# Altium PCB FLIGHTUmbilicalBoard_Rev1.PcbDoc
Units mil, origin at the board's own origin, x right, y up, seen from the top; angles counter-clockwise.
Board outline 3570 x 3720 mil, 6 copper layers (Top Layer, Mid-Layer 1, Mid-Layer 2, Internal Plane 1, Internal Plane 2, Bottom Layer); 33 components, 52 nets, 325 pads, 4 vias.
Unrouted connection lines stored in the file: 8.
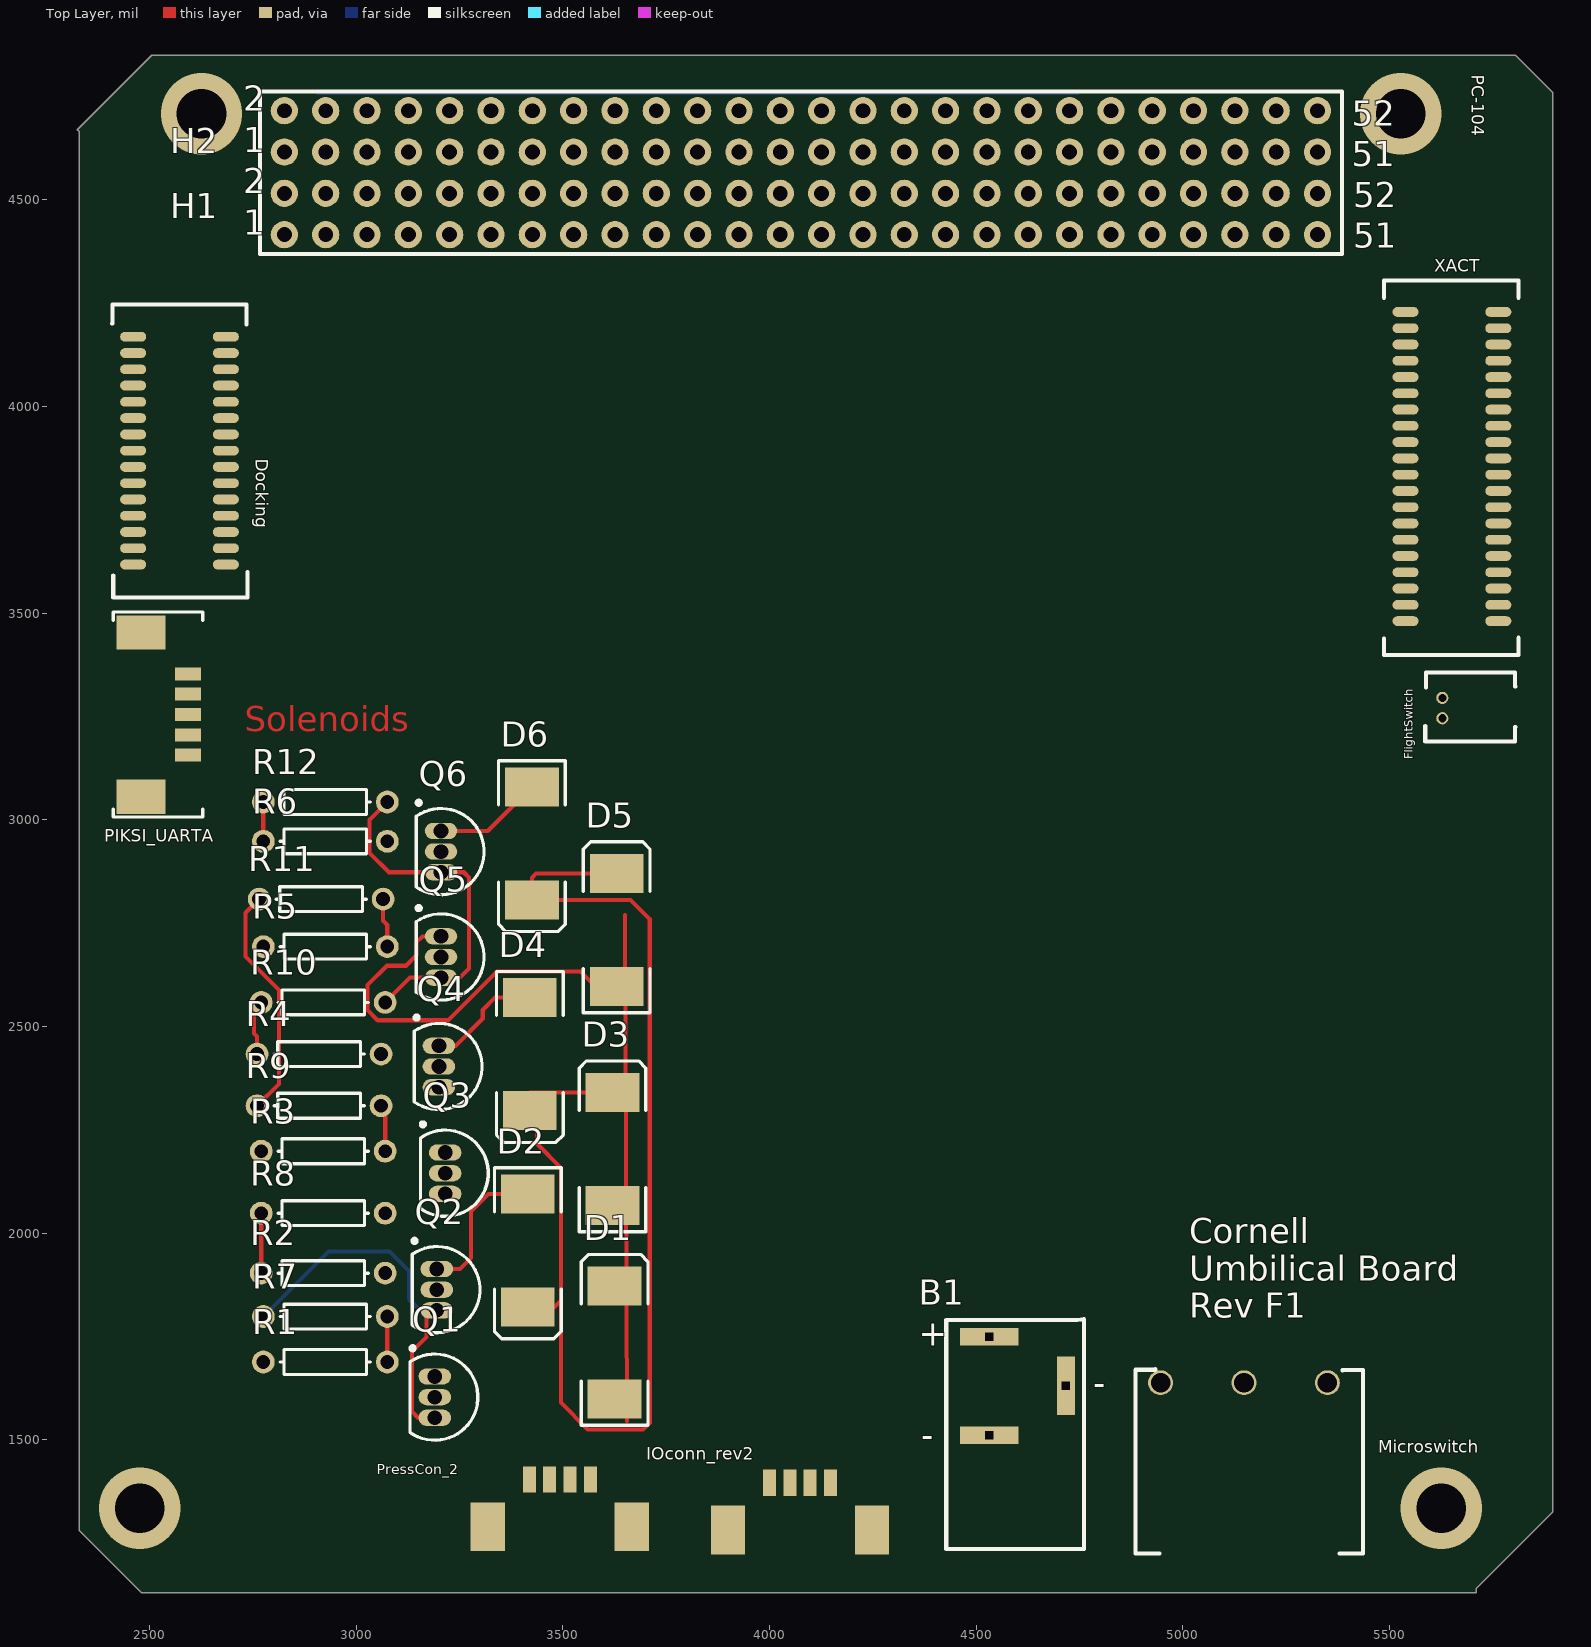
[diagram p0: Top Layer view]
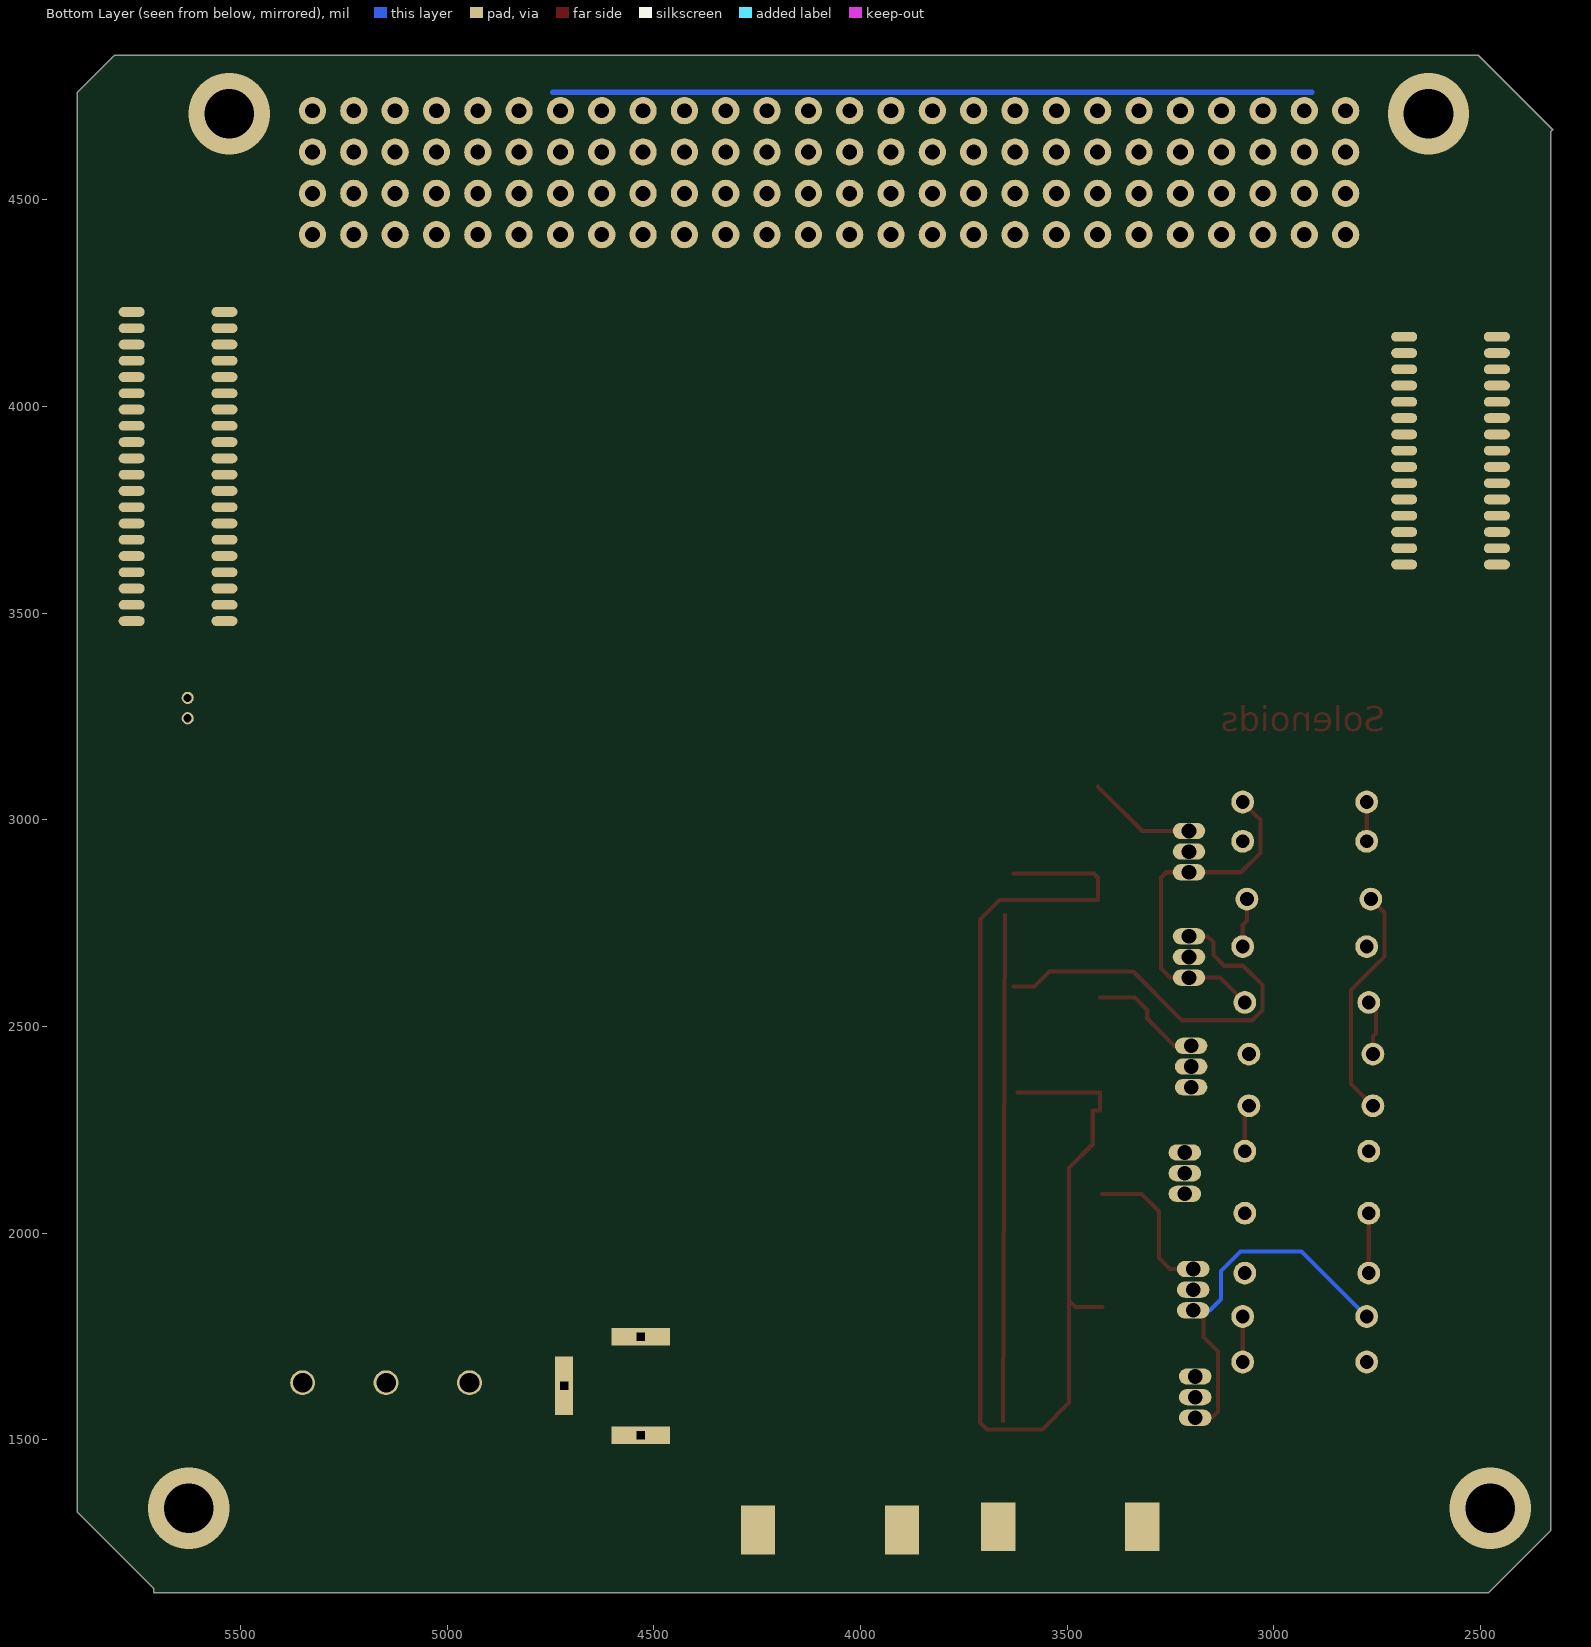
[diagram p1: Bottom Layer view, seen from below]
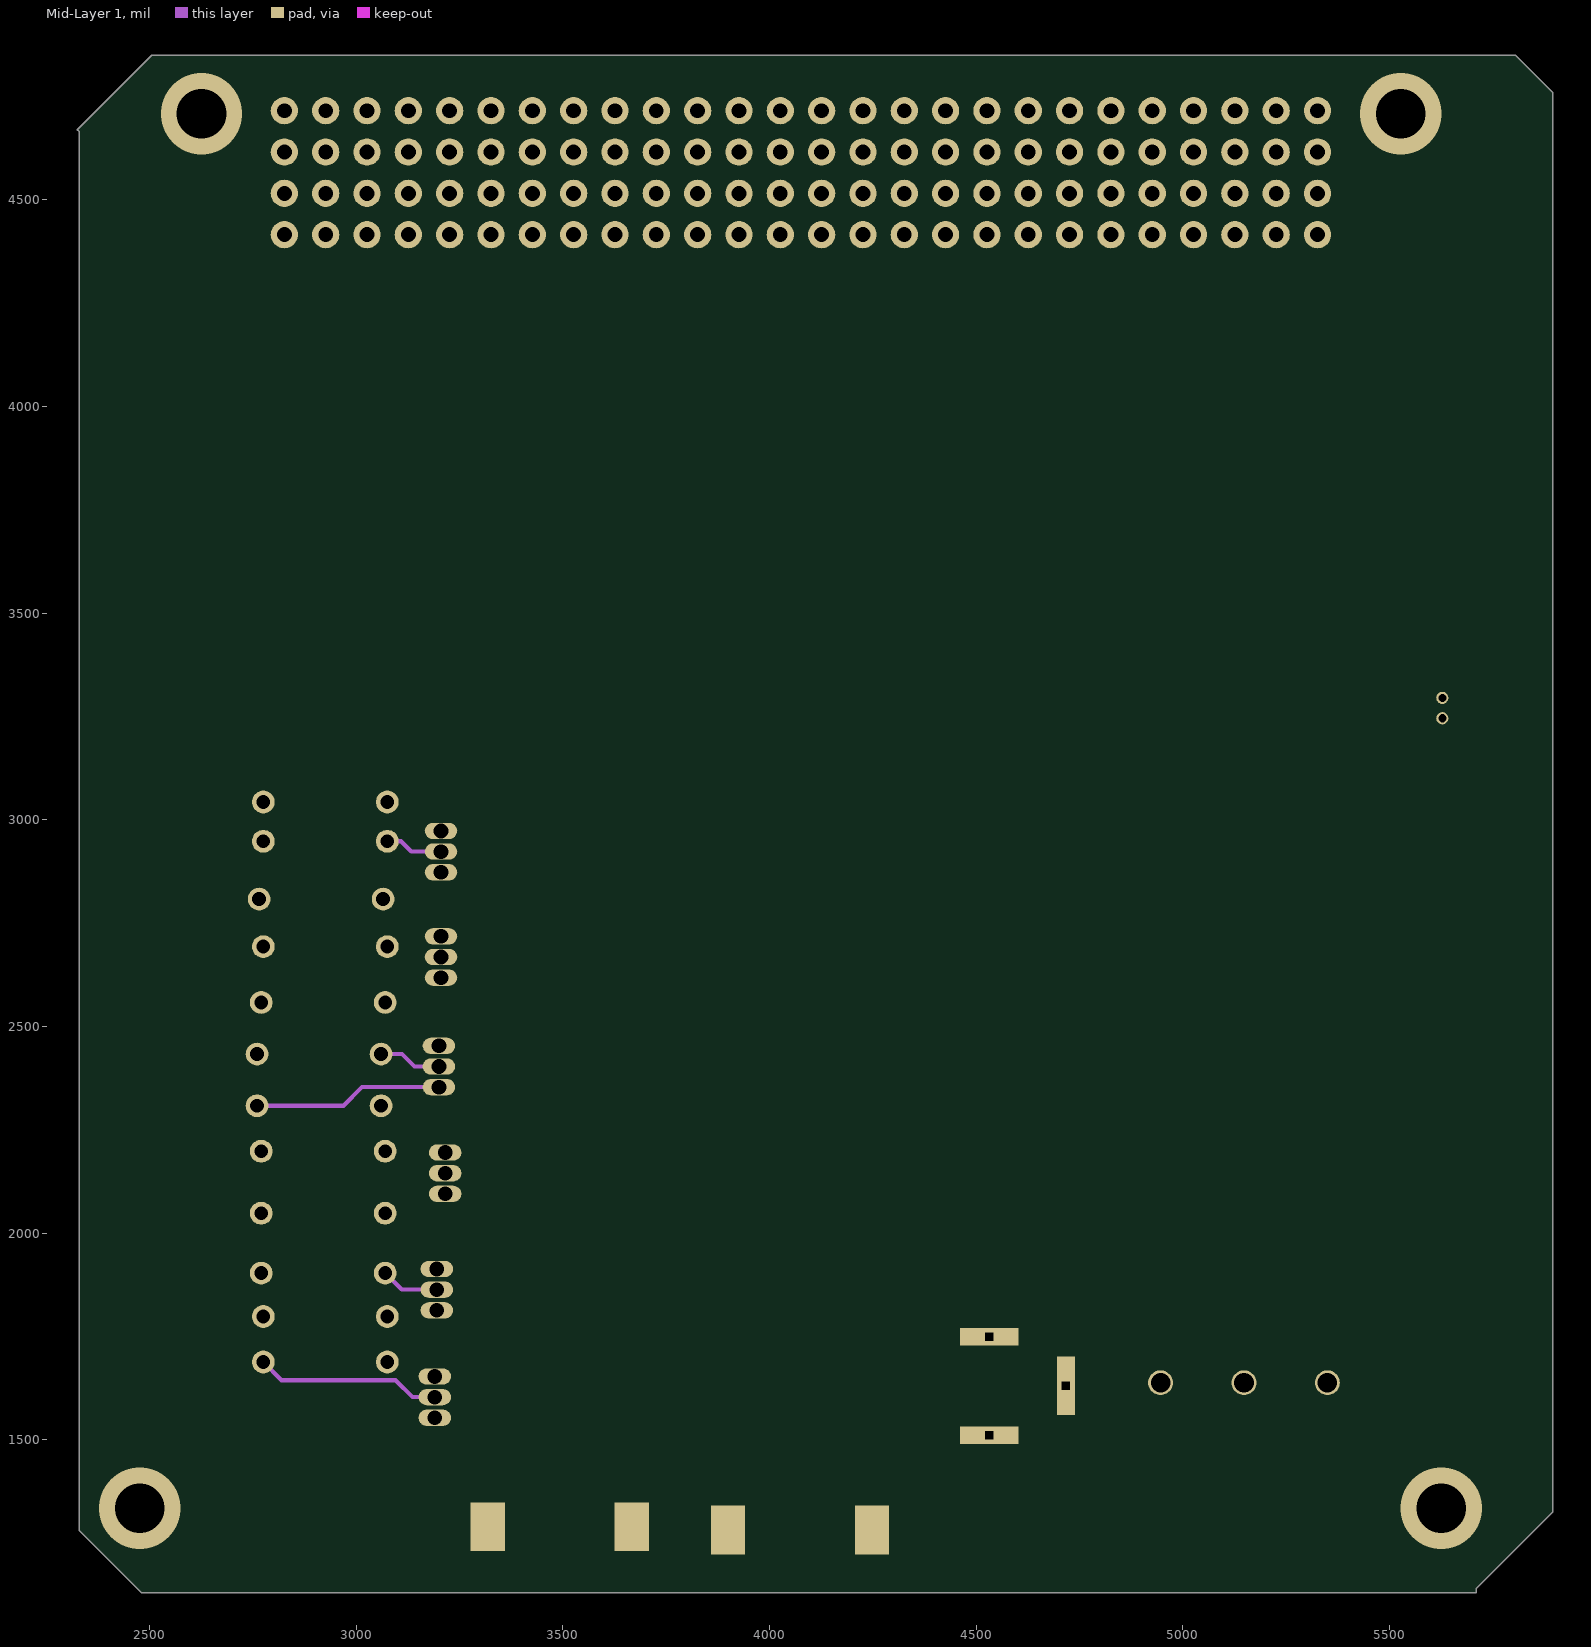
[diagram p2: Mid-Layer 1]
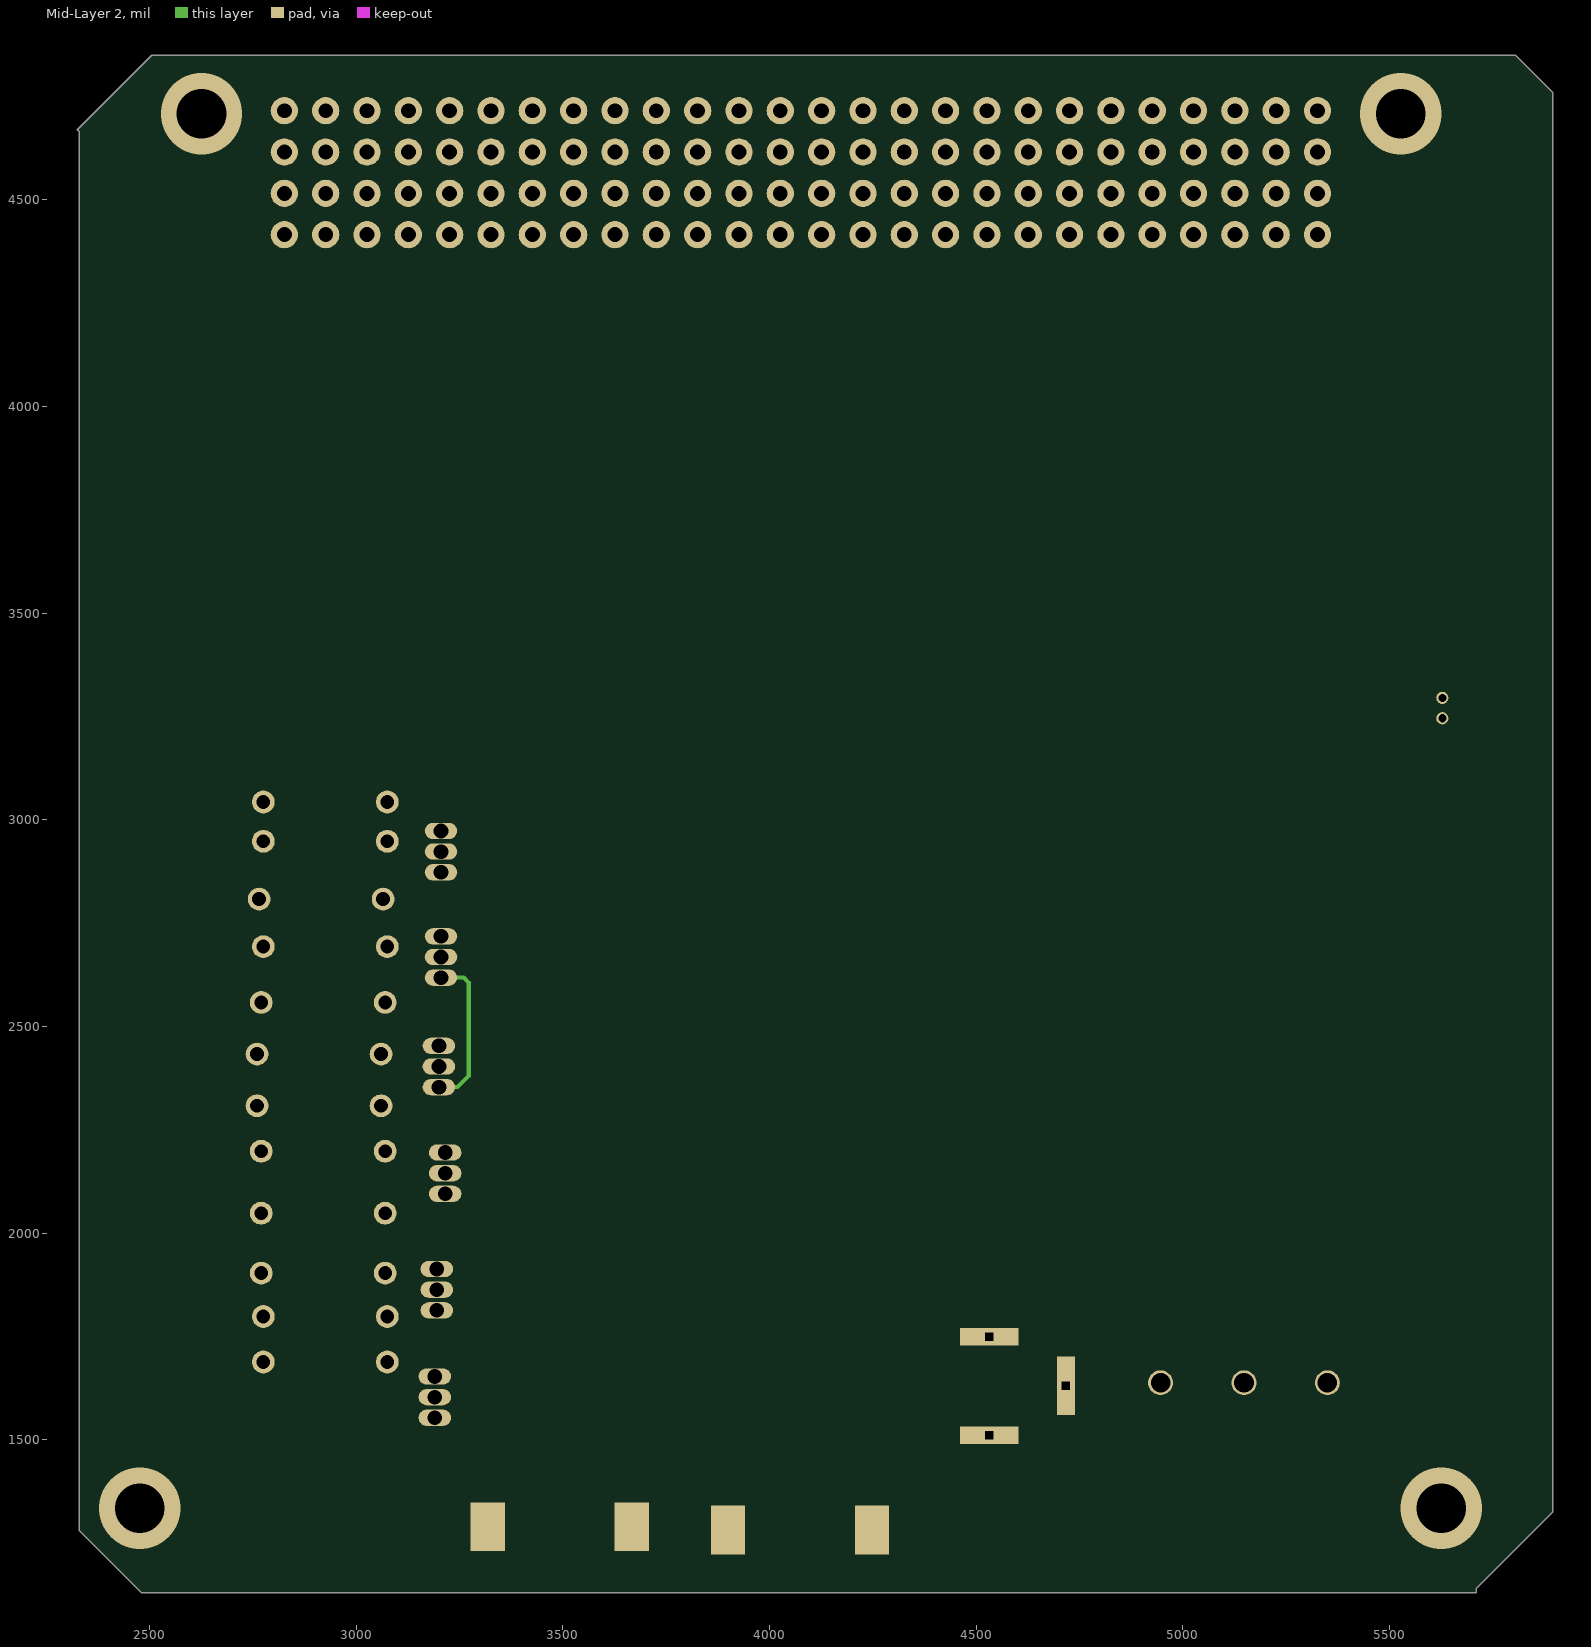
[diagram p3: Mid-Layer 2]
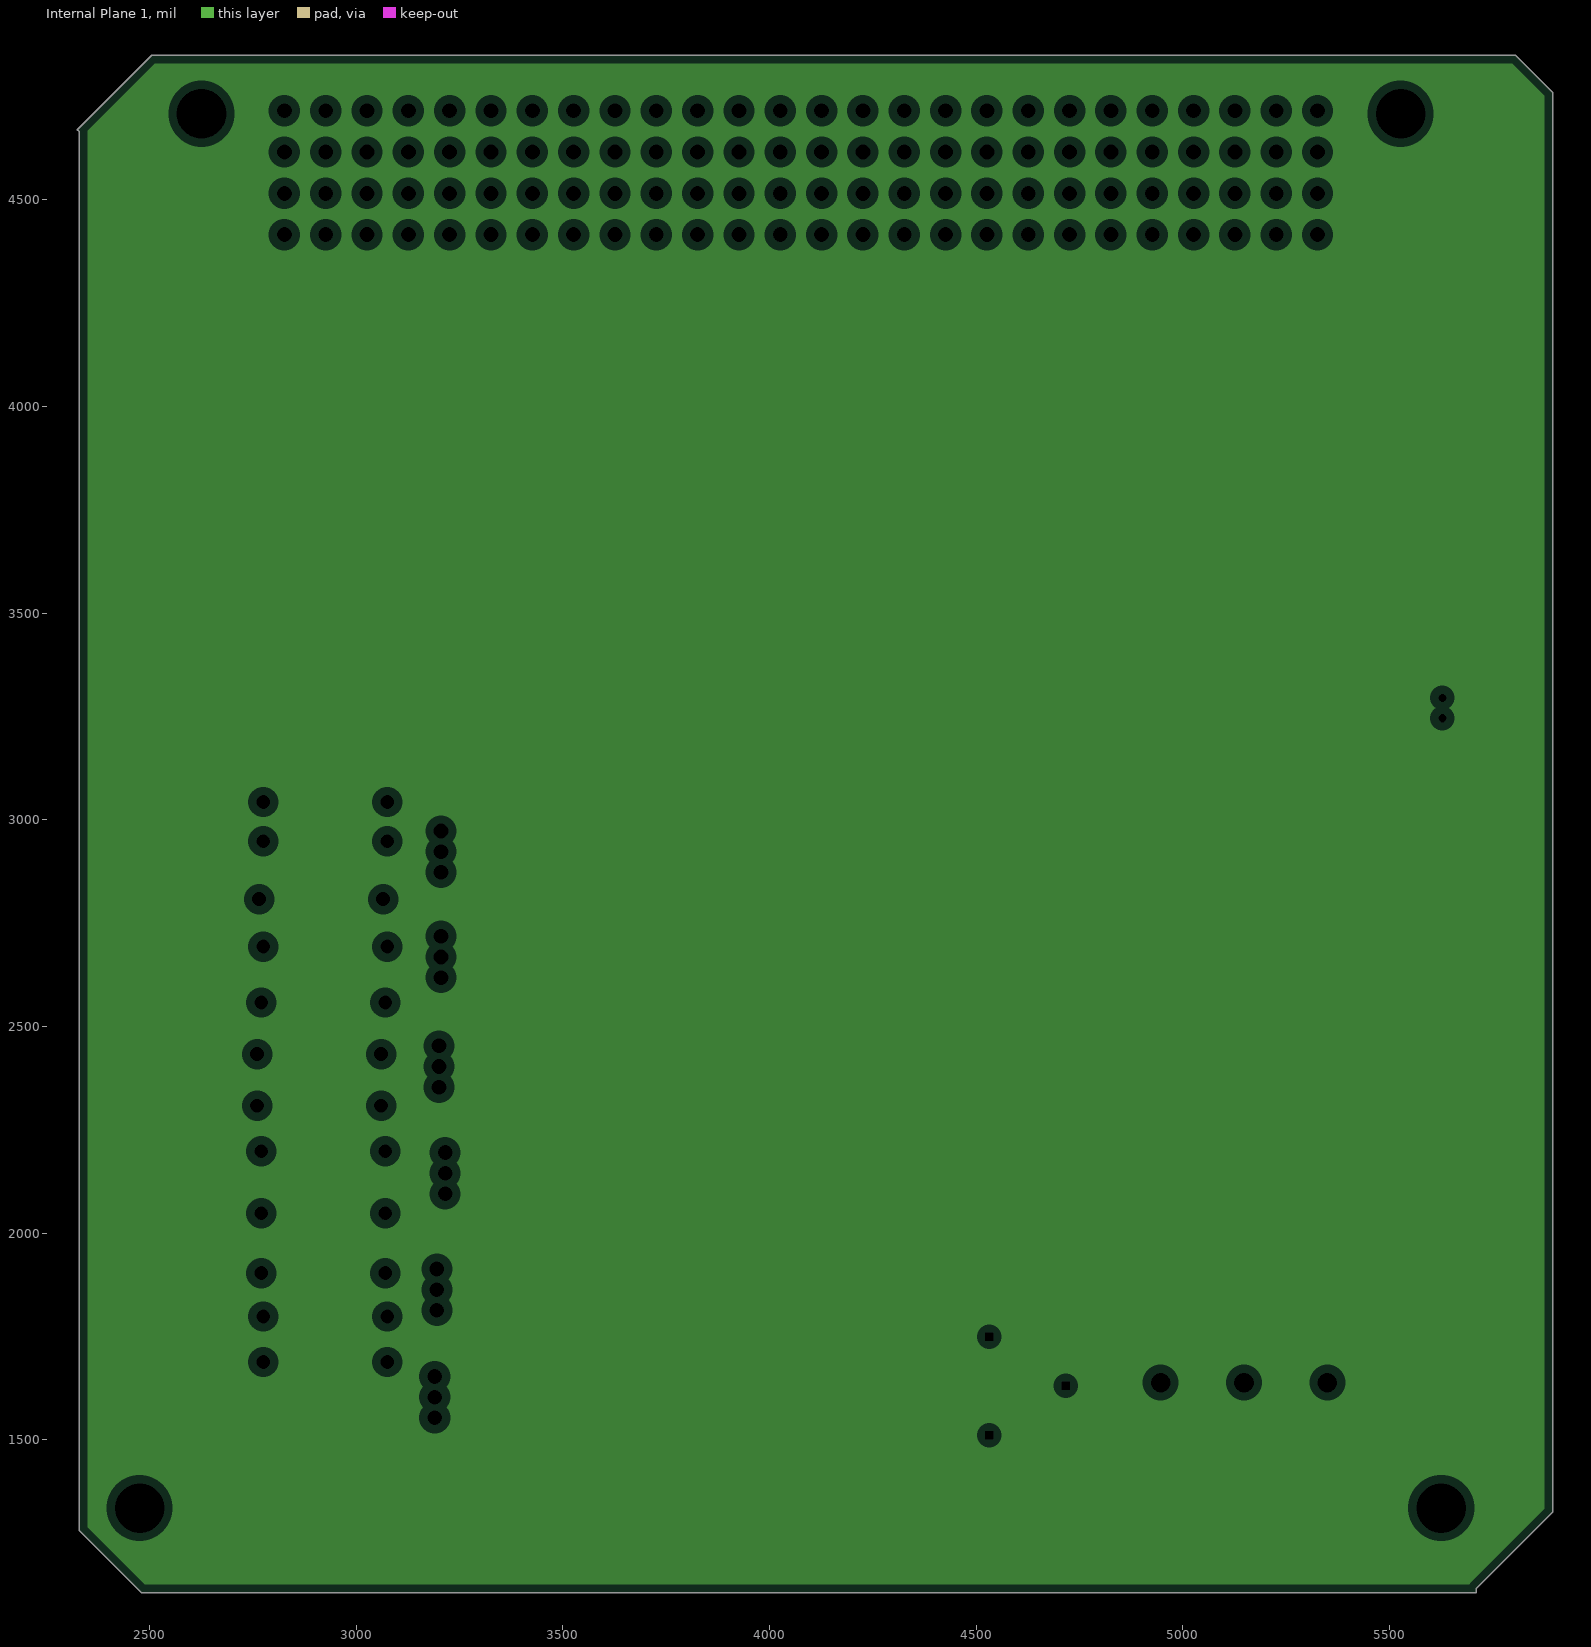
[diagram p4: Internal Plane 1, clearances drawn from the general rule]
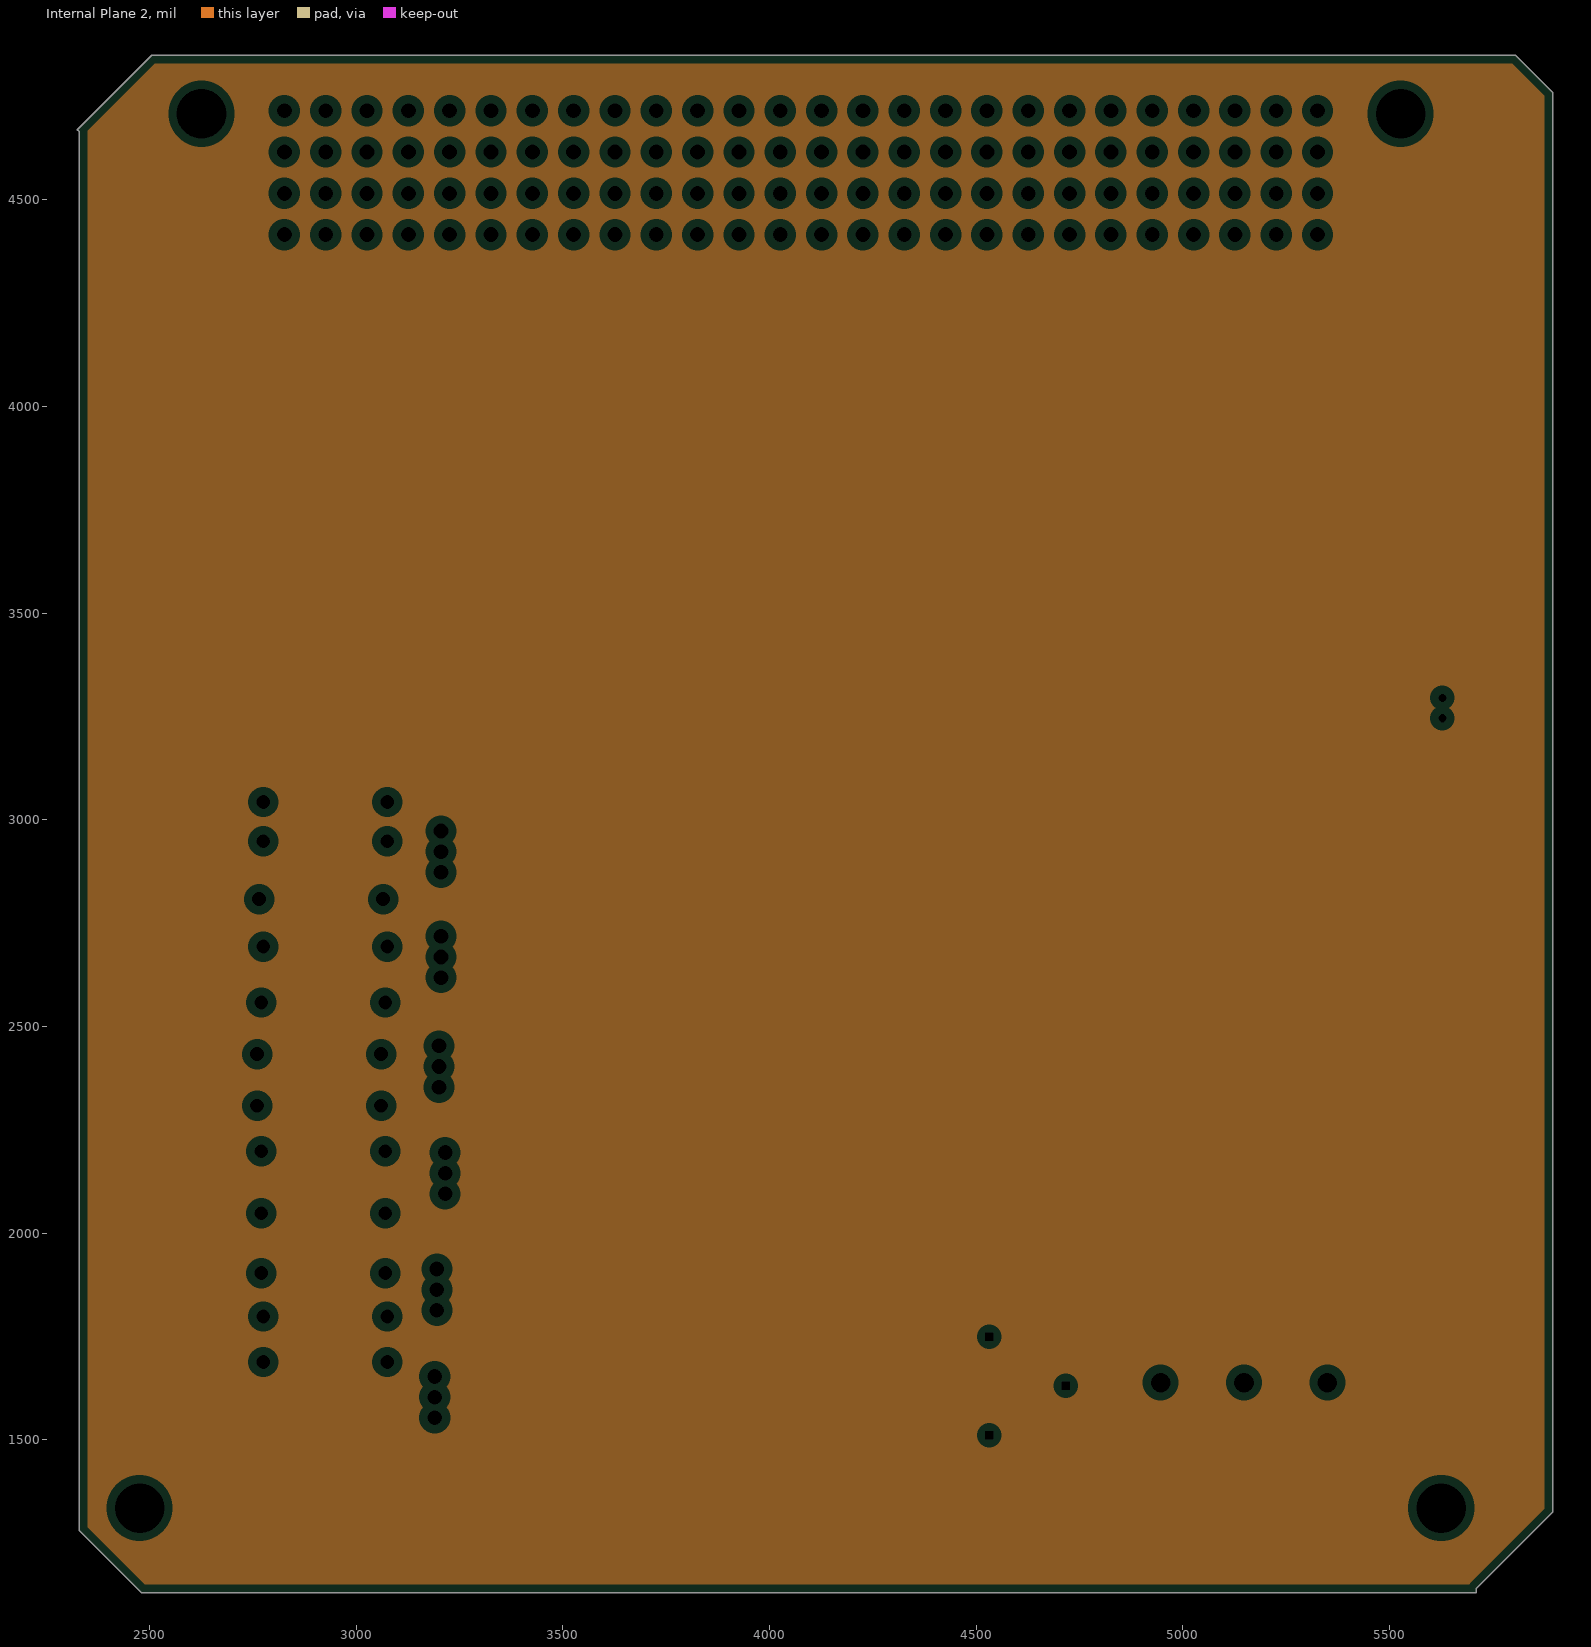
[diagram p5: Internal Plane 2, clearances drawn from the general rule]

## Layer stack, top to bottom
Top Solder: solder mask 0.4, Solder Resist, Dk 3.5
Top Layer: signal copper 1.4
Dielectric 1: dielectric 12.6, FR-4, Dk 4.8
Mid-Layer 1: signal copper 1.4
Dielectric4: dielectric 12.6, FR-4, Dk 4.8
Mid-Layer 2: signal copper 1.4
Dielectric5: dielectric 12.6, FR-4, Dk 4.8
Internal Plane 1: plane copper 1.4
Dielectric2: dielectric 12.6, FR-4, Dk 4.8
Internal Plane 2: plane copper 1.4
Dielectric3: dielectric 12.6, FR-4, Dk 4.8
Bottom Layer: signal copper 1.4
Bottom Solder: solder mask 0.4, Solder Resist, Dk 3.5

## Board outline
2510,4850 2505,4850 2325,4670 2330,4665 2330,1280 2480,1130 5710,1130 5710,1140 5885,1315 5895,1325 5895,4755 5895,4760 5805,4850 2510,4850

## Design rules (kind name [scope] priority, off if disabled: settings)
Clearance [All] p1: gap=10
PlaneClearance [All] p1: clearance=20
PlaneConnect [All] p1: planeconnectstyle=Relief reliefexpansion=20 reliefentries=4 reliefconductorwidth=10 reliefairgap=10
PolygonConnect [All] p1: connectstyle=Relief reliefconductorwidth=10 reliefentries=4 polygonreliefangle="90 Angle" airgapwidth=10
RoomDefinition Propulsion [InComponentClass('Propulsion')] p1: confinementstyle=ConfineIn formatcopy=TRUE lockcomponents=FALSE outline 2705,1486.38 3745,1486.38 3745,3266.38 2705,3266.38
RoutingVias [All] p1: holewidth=28 width=50 viastyle="Through Hole" minholewidth=28 minwidth=50 maxholewidth=28 maxwidth=50
SolderMaskExpansion [All] p1: expansion=4
Width [All] p1: maxlimit=10 minlimit=10 preferedwidth=10
28 further rules are at their usual default settings.

## Classes and differential pairs
component class 2017-04-23_07-42-101: Ccomp Ccomp2 Cout Cout_2 Css Iout L1 M1 Rcomp Rt U1 Vin
component class 2017-04-23_07-49-121: Ccomp Ccomp2 Cout Cout_2 Css Iout L1 M1 Rcomp Rt U1 Vin
component class BarrelJack: B1
component class CDGPS: PIKSI_UARTA
component class Propulsion: D2 D3 D4 D5 D6 Q1 Q2 Q4 Q5 Q6 R1 R2 R3 R4 R5 R6 R7 R8 R9 R10 R11 R12 SolConn

## Components (designator, comment, footprint, x,y, rotation, side; value= is the part's Value field where it differs from the comment)
B1 "Barrel_Jack" Barrel_Jack 4532,1511 r0 top
D1 "Diode" SMC 3625,1735 r90 top
D2 "Diode" SMC 3415,1958.19 r270 top
D3 "Diode" SMC 3620,2203.19 r90 top
D4 "Diode" SMC 3420,2433.19 r270 top
D5 "Diode" SMC 3630,2733.19 r90 top
D6 "Diode" SMC 3425,2943.19 r270 top
Docking "Docking_Molex_30Pin" DOCKING_MOLEX_30PIN 2460,4169 r270 top
FlightSwitch "RemoverBeforeFlightSwitch" "REMOVERBEFOREFLIGHT SWITCH" 5628,3169 r90 top
IOconn_rev2 "IOconn_rev2" IOCONN_REV2 4000,1396 r0 top
Microswitch "MicroSwitch" MICROSWITCH_3PIN 5150,1640 r180 top locked
PC-104 "PC-104" ? 2826,4416 r0 top locked
PIKSI_UARTA "PIKSI_UART Connector" "MOLEX PICOBLADE 5 PIN" 2420,3495 r270 top
PressCon_2 "PressureConn_2" PRESSCON_2 3392,1378 r0 top
Q1 "MOSFET" TO-226-AA 3190,1603.19 r180 top
Q2 "MOSFET" TO-226-AA 3195,1863.19 r180 top
Q3 "MOSFET" TO-226-AA 3215,2145 r180 top
Q4 "MOSFET" TO-226-AA 3200,2403.19 r180 top
Q5 "MOSFET" TO-226-AA 3205,2668.19 r180 top
Q6 "MOSFET" TO-226-AA 3205,2923.19 r180 top
R1 "100" AXIAL-0.3 2925,1688.19 r180 top
R2 "100" AXIAL-0.3 2920,1903.19 r0 top
R3 "100" AXIAL-0.3 2920,2198.19 r180 top
R4 "100" AXIAL-0.3 2910,2433.19 r0 top
R5 "100" AXIAL-0.3 2925,2693.19 r180 top
R6 "100" AXIAL-0.3 2925,2948.19 r0 top
R7 "10k" AXIAL-0.3 2925,1798.19 r0 top
R8 "10k" AXIAL-0.3 2920,2048.19 r180 top
R9 "10k" AXIAL-0.3 2910,2308.19 r0 top
R10 "10k" AXIAL-0.3 2920,2558.19 r180 top
R11 "10k" AXIAL-0.3 2915,2808.19 r0 top
R12 "10k" AXIAL-0.3 2925,3043.19 r180 top
XACT "XACT_Molex_40Pin" XACT_MOLEX_40PIN 5539,4229 r270 top

## Footprints (in the part's own frame and the unit in brackets; to place one, negate y for a bottom-side part, rotate by r counter-clockwise, add the part's x,y. Pads: shape width x height; smd on the part's side, far side on the other; paste and mask are expansions set on the pad)
AXIAL-0.3 [mm] "Axial Device, Thru-Hole; 2 Leads; 0.3 in Pin Spacing"
  round 1.4 hole 0.85: 1(-3.81,0) 2(3.81,0)
  silkscreen extent -2.77,-0.76 2.77,0.76
Barrel_Jack [mm] "KLDX-0202-B"
  rect 3.6x1.1 hole 0.5 square: 0(0,0) 2(0,6.05)
  rect 1.1x3.6 hole 0.5 square: 1(4.7,3.05)
  silkscreen extent -2.65,-7 5.82,7.13
DOCKING_MOLEX_30PIN [mm] "501571-3007"
  oval 0.6x1.6 smd: A1(0,0) A2(1,0) A3(2,0) A4(3,0) A5(4,0) A6(5,0) A7(6,0) A8(7,0) A9(8,0) A10(9,0) A11(10,0) A12(11,0) A13(12,0) A14(13,0) A15(14,0) A16(0,5.7) A17(1,5.7) A18(2,5.7) A19(3,5.7) A20(4,5.7) A21(5,5.7) A22(6,5.7) A23(7,5.7) A24(8,5.7) A25(9,5.7) A26(10,5.7) A27(11,5.7) A28(12,5.7) A29(13,5.7) A30(14,5.7)
  oval 0.6x1.6 smd far side: B1(0,0) B2(1,0) B3(2,0) B4(3,0) B5(4,0) B6(5,0) B7(6,0) B8(7,0) B9(8,0) B10(9,0) B11(10,0) B12(11,0) B13(12,0) B14(13,0) B15(14,0) B16(0,5.7) B17(1,5.7) B18(2,5.7) B19(3,5.7) B20(4,5.7) B21(5,5.7) B22(6,5.7) B23(7,5.7) B24(8,5.7) B25(9,5.7) B26(10,5.7) B27(11,5.7) B28(12,5.7) B29(13,5.7) B30(14,5.7)
  silkscreen extent -1.98,-1.3 16.03,7.02, body extent -1.97,-1.27 16.02,6.98, height 2.95
IOCONN_REV2 [mm] "Molex 4 Pin Picoblade. Part # 53261-0471"
  rect 0.8x1.6 smd: 1(0,0) 2(1.25,0) 3(2.5,0) 4(3.75,0)
  rect 2.1x3 all layers, no hole: 5(-2.55,-2.9) 6(6.3,-2.9)
  body extent -3.22,-4.47 6.93,0.73, height 1.7
MICROSWITCH_3PIN [mm] "Omron Electronics Inc-EMC Div D2FS-FL-N-A1"
  round 1.524 hole 1.2: 1(-5.08,0.05) 2(0.05,0.05) 3(5.18,0.05)
  silkscreen extent -7.25,-0.78 6.73,10.55, body extent -7.25,-0.75 6.73,10.55
"MOLEX PICOBLADE 5 PIN" [mm] "Molex Picoblade Header, SMT, Right Angle  53261-0571"
  rect 0.8x1.6 smd: 0(3.6,4.4) 1(4.85,4.4) 2(6.1,4.4) 3(7.35,4.4) 4(8.6,4.4)
  rect 2.1x3 smd: 5(1.05,1.5) 6(11.15,1.5)
  silkscreen extent -0.2,-0.2 12.4,5.3, body extent 0.4,0 11.8,5.2, height 3.4
PRESSCON_2 [mm] "Molex Picoblade 4 pin (for the second pressure conn) Part # 53261-0471"
  rect 0.8x1.6 smd: 1(0.675,0.65) 2(1.925,0.65) 3(3.175,0.65) 4(4.425,0.65)
  rect 2.1x3 all layers, no hole: 5(-1.875,-2.25) 6(6.975,-2.25)
  body extent -2.55,-3.82 7.6,1.38, height 1.7
"REMOVERBEFOREFLIGHT SWITCH" [mm] "Molex Picoblade Part Number: 53048-0210"
  round 0.75 hole 0.5: 1(1.95,0) 2(3.205,0)
  silkscreen extent 0.53,-4.5 4.78,1.05, body extent 0.53,-4.47 4.78,1.03, height 4.05
SMC [mm] "DO-214-AB/SMC; 2 C-Bend Leads; Body 7.9 x 5.9 mm, inc. leads (LxW)"
  rect 2.4x3.3 smd: 1(-3.475,0) 2(3.475,0)
  silkscreen extent -5.08,-2.05 5.42,2.06
TO-226-AA [mm] "TO, Flat Index; 3 In-Line, Axial Leads; Body Dia. 4.8mm; Leads 0.55 x 0.51 mm (max)"
  oval 2x1 hole 0.9: 1(0,-1.27) 2(0,0) 3(0,1.27)
  silkscreen extent -2.65,-3.13 1.52,2.65, body extent -2.65,-2.66 1.52,2.66, height 5.33
XACT_MOLEX_40PIN [mm] "501571-4007"
  oval 0.6x1.6 smd: A1(0,0) A2(1,0) A3(2,0) A4(3,0) A5(4,0) A6(5,0) A7(6,0) A8(7,0) A9(8,0) A10(9,0) A11(10,0) A12(11,0) A13(12,0) A14(13,0) A15(14,0) A16(15,0) A17(16,0) A18(17,0) A19(18,0) A20(19,0) A21(0,5.7) A22(1,5.7) A23(2,5.7) A24(3,5.7) A25(4,5.7) A26(5,5.7) A27(6,5.7) A28(7,5.7) A29(8,5.7) A30(9,5.7) A31(10,5.7) A32(11,5.7) A33(12,5.7) A34(13,5.7) A35(14,5.7) A36(15,5.7) A37(16,5.7) A38(17,5.7) A39(18,5.7) A40(19,5.7)
  oval 0.6x1.6 smd far side: B1(0,0) B2(1,0) B3(2,0) B4(3,0) B5(4,0) B6(5,0) B7(6,0) B8(7,0) B9(8,0) B10(9,0) B11(10,0) B12(11,0) B13(12,0) B14(13,0) B15(14,0) B16(15,0) B17(16,0) B18(17,0) B19(18,0) B20(19,0) B21(0,5.7) B22(1,5.7) B23(2,5.7) B24(3,5.7) B25(4,5.7) B26(5,5.7) B27(6,5.7) B28(7,5.7) B29(8,5.7) B30(9,5.7) B31(10,5.7) B32(11,5.7) B33(12,5.7) B34(13,5.7) B35(14,5.7) B36(15,5.7) B37(16,5.7) B38(17,5.7) B39(18,5.7) B40(19,5.7)
  silkscreen extent -1.92,-1.32 21.08,6.95, body extent -1.85,-1.35 21.15,6.9, height 2.95
? [mil] "ESQ-126-14-G-D"
  round 65.98 hole 35.98 mask+2.99: H1_1(0,0) H1_2(0,100) H1_3(100,0) H1_4(100,100) H1_5(200,0) H1_6(200,100) H1_7(300,0) H1_8(300,100) H1_9(400,0) H1_10(400,100) H1_11(500,0) H1_12(500,100) H1_13(600,0) H1_14(600,100) H1_15(700,0) H1_16(700,100) H1_17(800,0) H1_18(800,100) H1_19(900,0) H1_20(900,100) H1_21(1000,0) H1_22(1000,100) H1_23(1100,0) H1_24(1100,100) H1_25(1200,0) H1_26(1200,100) H1_27(1300,0) H1_28(1300,100) H1_29(1400,0) H1_30(1400,100) H1_31(1500,0) H1_32(1500,100) H1_33(1600,0) H1_34(1600,100) H1_35(1700,0) H1_36(1700,100) H1_37(1800,0) H1_38(1800,100) H1_39(1900,0) H1_40(1900,100) H1_41(2000,0) H1_42(2000,100) H1_43(2100,0) H1_44(2100,100) H1_45(2200,0) H1_46(2200,100) H1_47(2300,0) H1_48(2300,100) H1_49(2400,0) H1_50(2400,100) H1_51(2500,0) H1_52(2500,100) H2_1(0,200) H2_2(0,300) H2_3(100,200) H2_4(100,300) H2_5(200,200) H2_6(200,300) H2_7(300,200) H2_8(300,300) H2_9(400,200) H2_10(400,300) H2_11(500,200) H2_12(500,300) H2_13(600,200) H2_14(600,300) H2_15(700,200) H2_16(700,300) H2_17(800,200) H2_18(800,300) H2_19(900,200) H2_20(900,300) H2_21(1000,200) H2_22(1000,300) H2_23(1100,200) H2_24(1100,300) H2_25(1200,200) H2_26(1200,300) H2_27(1300,200) H2_28(1300,300) H2_29(1400,200) H2_30(1400,300) H2_31(1500,200) H2_32(1500,300) H2_33(1600,200) H2_34(1600,300) H2_35(1700,200) H2_36(1700,300) H2_37(1800,200) H2_38(1800,300) H2_39(1900,200) H2_40(1900,300) H2_41(2000,200) H2_42(2000,300) H2_43(2100,200) H2_44(2100,300) H2_45(2200,200) H2_46(2200,300) H2_47(2300,200) H2_48(2300,300) H2_49(2400,200) H2_50(2400,300) H2_51(2500,200) H2_52(2500,300)
  silkscreen extent -59,-47 2559,347

## Part data
D1 D2 D3 D4 D5 D6: "Default Diode"
Docking: "24 Pin Connector"
FlightSwitch: "53048-0210 Molex Picoblade"
IOconn_rev2: "Part Number: 53261-0471"
Microswitch: "Omron Electronics Inc-EMC Div D2FS-FL-N-A1"
PC-104: "ESQ-126-14-G-D (2 total needed)"
PIKSI_UARTA: "Molex Picoblade 5 Pin"
Q1 Q2 Q3 Q4 Q5 Q6: library part MOSFET-N, "N-Channel MOSFET"
R1 R2 R3 R4 R5 R6 R7 R8 R9 R10 R11 R12: library part PMR100HZPFU6L00, "Imported"
XACT: "31 Pin Airborn Nano Connector"

## Via types
v1: diameter 196.85, hole 120, Top Layer to Bottom Layer, 4 vias

## Nets (pads, with @x,y where several pads share a name; then routed paths per layer and width w, separated by ;. In a path a pad name is that pad's centre, name@x,y a point inside that pad or via, vN(x,y) a via of type N, cw(c..) or ccw(c..) an arc to the next point about the centre after c; other vN are vias at no path point)
0: 
+5V_3: PIKSI_UARTA.4
+12V_1_JUMP10: D2.2 D3.2 D4.2 D5.2 D6.2 | length 3112.3
  Top Layer w10: D2.2 3480,1821.38 3495,1836.38 ; D3.2 3420,2340 D4.2 3438,2296.38 3438,2215 3495,2158 3495,1836.38 ; D5.2 3435,2870 3425,2860 D6.2 3663.62,2806.38 3710,2760 3710,1541 3694,1525 3560,1525 3495,1590 3495,1836.38
FB1: Q1.1
FB2: D2.1 Q2.1 | length 361.5
  Top Layer w10: Q2.1 3251.19,1913.19 3278,1940 3278,2053 3320,2095 D2.1
FB3: D3.1 Q3.1
FB4: D4.1 Q4.1 | length 280.6
  Top Layer w10: Q4.1 3240,2453.19 3306,2519.19 3306,2540 3336,2570 D4.1
FB5: D5.1 Q5.1 | length 982.6
  Top Layer w10: Q5.1 3160,2718.19 3146,2704.19 3146,2673 3120,2647 3074,2647 3027,2600 3027,2540 3052,2515 3222,2515 3340,2633 3542.38,2633 3579,2596.38 D5.1
FB6: D6.1 Q6.1 | length 264.2
  Top Layer w10: Q6.1 3318.19,2973.19 D6.1
GOM_GND_1: B1.0 B1.1 PIKSI_UARTA.0 Q1.3 Q2.3 Q3.3 Q4.3 Q5.3 Q6.3 R7.1 R8.1 R9.1 R10.1 R11.1 R12.1 | length 3203
  Top Layer w10: R9.1 2813,2361.19 2813,2588 2732,2669 2732,2775.19 R11.1 ; R10.1 3130,2618.19 Q5.3 3251.19,2618.19 3273,2640 3273,2860.19 3260,2873.19 Q6.3 3078.81,2873.19 3032,2920 3032,3000.19 R12.1 ; Q1.3 3150,1553.19 3135,1568.19 3135,1714 3170,1749 3170,1813.19 Q2.3
  Mid-Layer 1 w10: R9.1 2969.19,2308.19 3014.19,2353.19 Q4.3
  Mid-Layer 2 w10: Q4.3 3245.19,2353.19 3272,2380 3272,2606.19 3260,2618.19 Q5.3
  Bottom Layer w10: R7.1 2932.81,1956 3080,1956 3128,1908 3128,1840 3154.81,1813.19 Q2.3
NetB1_2: B1.2
NetC12_1: 
NetC12_2: 
NetCboot_1: 
NetCboot_2: 
NetCbyp_1: 
NetCcomp2_1: 
NetCcomp2_2: 
NetCcomp_1: 
NetCcomp_2: 
NetCcs_1: 
NetCin_1: 
NetCout1_1: D1.2
NetCout_1: 
NetCss_1: 
NetCvcc_1: 
NetD1_1: D1.1
NetL1_2: 
NetM1_1: 
NetM1_4: 
NetM2_1: 
NetM2_4: 
NetM2_5: 
NetQ1_2: Q1.2 R1.2 | length 450.2
  Mid-Layer 1 w10: R1.2 2819.19,1644 3095.19,1644 3136,1603.19 Q1.2
NetQ2_2: Q2.2 R2.2 | length 141.6
  Mid-Layer 1 w10: R2.2 3110,1863.19 Q2.2
NetQ3_2: Q3.2 R3.2
NetQ4_2: Q4.2 R4.2 | length 152.4
  Mid-Layer 1 w10: R4.2 3111,2433.19 3141,2403.19 Q4.2
NetQ6_2: Q6.2 R6.2 | length 140.4
  Mid-Layer 1 w10: R6.2 3108,2948.19 3133,2923.19 Q6.2
NetR1_1: R1.1 R7.2 | length 110
  Top Layer w10: R1.1 R7.2
NetR2_1: R2.1 R8.2 | length 145
  Top Layer w10: R2.1 R8.2
NetR3_1: R3.1 R9.2 | length 120
  Top Layer w10: R9.2 3070,2308.19 R3.1
NetR4_1: R4.1 R10.2 | length 135.4
  Top Layer w10: R4.1 2760,2476 2752.5,2483.5 2752.5,2540.69 R10.2
NetR5_1: R5.1 R11.2 | length 119.1
  Top Layer w10: R11.2 3065,2756 3075,2746 R5.1
NetR6_1: R6.1 R12.2 | length 95
  Top Layer w10: R6.1 R12.2
NetR19_1: 
NetRfbb_1: 
NetRpg_2: 
NetRs2_1: 
NetRt_2: 
NetRuv1_2: 
UART5_RX_J5: PIKSI_UARTA.1
UART5_TX_J6: PIKSI_UARTA.2
pads on no net: Docking.A1 Docking.A2 Docking.A3 Docking.A4 Docking.A5 Docking.A6 Docking.A7 Docking.A8 Docking.A9 Docking.A10 Docking.A11 Docking.A12 Docking.A13 Docking.A14 Docking.A15 Docking.A16 Docking.A17 Docking.A18 Docking.A19 Docking.A20 Docking.A21 Docking.A22 Docking.A23 Docking.A24 Docking.A25 Docking.A26 Docking.A27 Docking.A28 Docking.A29 Docking.A30 Docking.B1 Docking.B2 Docking.B3 Docking.B4 Docking.B5 Docking.B6 Docking.B7 Docking.B8 Docking.B9 Docking.B10 Docking.B11 Docking.B12 Docking.B13 Docking.B14 Docking.B15 Docking.B16 Docking.B17 Docking.B18 Docking.B19 Docking.B20 Docking.B21 Docking.B22 Docking.B23 Docking.B24 Docking.B25 Docking.B26 Docking.B27 Docking.B28 Docking.B29 Docking.B30 FlightSwitch.1 FlightSwitch.2 IOconn_rev2.1 IOconn_rev2.2 IOconn_rev2.3 IOconn_rev2.4 IOconn_rev2.5 IOconn_rev2.6 Microswitch.1 Microswitch.2 Microswitch.3 PC-104.H1_1 PC-104.H1_2 PC-104.H1_3 PC-104.H1_4 PC-104.H1_5 PC-104.H1_6 PC-104.H1_7 PC-104.H1_8 PC-104.H1_9 PC-104.H1_10 PC-104.H1_11 PC-104.H1_12 PC-104.H1_13 PC-104.H1_14 PC-104.H1_15 PC-104.H1_16 PC-104.H1_17 PC-104.H1_18 PC-104.H1_19 PC-104.H1_20 PC-104.H1_21 PC-104.H1_22 PC-104.H1_23 PC-104.H1_24 PC-104.H1_25 PC-104.H1_26 PC-104.H1_27 PC-104.H1_28 PC-104.H1_29 PC-104.H1_30 PC-104.H1_31 PC-104.H1_32 PC-104.H1_33 PC-104.H1_34 PC-104.H1_35 PC-104.H1_36 PC-104.H1_37 PC-104.H1_38 PC-104.H1_39 PC-104.H1_40 PC-104.H1_41 PC-104.H1_42 PC-104.H1_43 PC-104.H1_44 PC-104.H1_45 PC-104.H1_46 PC-104.H1_47 PC-104.H1_48 PC-104.H1_49 PC-104.H1_50 PC-104.H1_51 PC-104.H1_52 PC-104.H2_1 PC-104.H2_2 PC-104.H2_3 PC-104.H2_4 PC-104.H2_5 PC-104.H2_6 PC-104.H2_7 PC-104.H2_8 PC-104.H2_9 PC-104.H2_10 PC-104.H2_11 PC-104.H2_12 PC-104.H2_13 PC-104.H2_14 PC-104.H2_15 PC-104.H2_16 PC-104.H2_17 PC-104.H2_18 PC-104.H2_19 PC-104.H2_20 PC-104.H2_21 PC-104.H2_22 PC-104.H2_23 PC-104.H2_24 PC-104.H2_25 PC-104.H2_26 PC-104.H2_27 PC-104.H2_28 PC-104.H2_29 PC-104.H2_30 PC-104.H2_31 PC-104.H2_32 PC-104.H2_33 PC-104.H2_34 PC-104.H2_35 PC-104.H2_36 PC-104.H2_37 PC-104.H2_38 PC-104.H2_39 PC-104.H2_40 PC-104.H2_41 PC-104.H2_42 PC-104.H2_43 PC-104.H2_44 PC-104.H2_45 PC-104.H2_46 PC-104.H2_47 PC-104.H2_48 PC-104.H2_49 PC-104.H2_50 PC-104.H2_51 PC-104.H2_52 PIKSI_UARTA.3 PIKSI_UARTA.5 PIKSI_UARTA.6 PressCon_2.1 PressCon_2.2 PressCon_2.3 PressCon_2.4 PressCon_2.5 PressCon_2.6 Q5.2 R5.2 XACT.A1 XACT.A2 XACT.A3 XACT.A4 XACT.A5 XACT.A6 XACT.A7 XACT.A8 XACT.A9 XACT.A10 XACT.A11 XACT.A12 XACT.A13 XACT.A14 XACT.A15 XACT.A16 XACT.A17 XACT.A18 XACT.A19 XACT.A20 XACT.A21 XACT.A22 XACT.A23 XACT.A24 XACT.A25 XACT.A26 XACT.A27 XACT.A28 XACT.A29 XACT.A30 XACT.A31 XACT.A32 XACT.A33 XACT.A34 XACT.A35 XACT.A36 XACT.A37 XACT.A38 XACT.A39 XACT.A40 XACT.B1 XACT.B2 XACT.B3 XACT.B4 XACT.B5 XACT.B6 XACT.B7 XACT.B8 XACT.B9 XACT.B10 XACT.B11 XACT.B12 XACT.B13 XACT.B14 XACT.B15 XACT.B16 XACT.B17 XACT.B18 XACT.B19 XACT.B20 XACT.B21 XACT.B22 XACT.B23 XACT.B24 XACT.B25 XACT.B26 XACT.B27 XACT.B28 XACT.B29 XACT.B30 XACT.B31 XACT.B32 XACT.B33 XACT.B34 XACT.B35 XACT.B36 XACT.B37 XACT.B38 XACT.B39 XACT.B40
copper on no net: | length 3061.9
  Top Layer w10: 3650,2770 3655,1545
  Bottom Layer w13: 2907.57,4760.49 4744.43,4760.49
  other v1: 2475.8,1334.7 5625.41,1334.7 2625.41,4708.72 5526.98,4708.72

## Polygon pours and split planes (outlines as drawn)
no net on Internal Plane 1 (split plane): 5874.9,4751.68 5874.9,1333.32 5870.79,1329.21 5695.79,1154.21 5693.29,1151.17 5692.72,1150.1 2488.32,1150.1 2350.1,1288.32 2350.1,4665 2349.95,4666.53 2513.32,4829.9 5796.68,4829.9
no net on Internal Plane 2 (split plane): 5874.9,4751.68 5874.9,1333.32 5870.79,1329.21 5695.79,1154.21 5693.29,1151.17 5692.72,1150.1 2488.32,1150.1 2350.1,1288.32 2350.1,4665 2349.95,4666.53 2513.32,4829.9 5796.68,4829.9

## Other copper
Top Layer:
  text "Solenoids" at 2730,3215 h60

## Silkscreen, mask and mechanical layers (free items; w line width, h text height)
Top Overlay:
  text "Cornell  / Umbilical Board  / Rev F1" at 5015,1795 h60
Mechanical 2:
  lines w30: 2349,1285 ccw(c2364,1285) 2353.41,1274.38 ; 2349,1285 ccw(c2364,1285) 2353.39,1274.39 ; 2349,1285 2349,4661 ; 2349,4661 cw(c2364,4661) 2353.39,4671.61 ; 2349,4661 cw(c2364,4661) 2353.41,4671.62 ; 2353.41,1274.38 2472.38,1155.41 ; 2353.39,1274.39 2353.41,1274.38 ; 2353.39,4671.61 2353.41,4671.62 ; 2353.41,4671.62 2514.38,4832.59 ; 2472.38,1155.41 ccw(c2483,1166) 2472.39,1155.39 ; 2472.39,1155.39 ccw(c2483,1166) 2472.41,1155.38 ; 2472.41,1155.38 2473.38,1154.41 ; 2472.39,1155.39 2472.41,1155.38 ; 2472.38,1155.41 2472.39,1155.39 ; 2473.38,1154.41 ccw(c2484,1165) 2484,1150 ; 2473.39,1154.39 ccw(c2484,1165) 2484,1150 ; 2473.38,1154.41 2473.39,1154.39 ; 2484,1150 5664,1150 5711,1150 ; 2514.38,4832.59 cw(c2525,4822) 2525,4837 ; 2514.39,4832.61 cw(c2525,4822) 2525,4837 ; 2514.38,4832.59 2514.39,4832.61 ; 2525,4837 2526,4837 5789.52,4837 ; 5711,1150 ccw(c5711,1165) 5721.62,1154.41 ; 5711,1150 ccw(c5711,1165) 5721.61,1154.39 ; 5721.61,1154.39 5721.62,1154.41 ; 5721.62,1154.41 5882.59,1315.38 ; 5789.52,4837 cw(c5797,4824) 5807.61,4834.61 ; 5789.52,4837 cw(c5797,4824) 5807.62,4834.59 ; 5807.62,4834.59 5882.59,4759.62 ; 5807.61,4834.61 5807.62,4834.59 ; 5882.59,1315.38 ccw(c5872,1326) 5887,1326 ; 5882.61,1315.39 ccw(c5872,1326) 5887,1326 ; 5882.59,1315.38 5882.61,1315.39 ; 5882.61,4759.61 cw(c5872,4749) 5887,4749 ; 5882.59,4759.62 cw(c5872,4749) 5887,4749 ; 5882.59,4759.62 5882.61,4759.61 ; 5887,1326 5887,4734 5887,4749

## Text inside footprints (layer, text, board x,y; h text height)
B1: Top Overlay "+" at 4360.74,1727.54 h60; Top Overlay "-" at 4782.98,1607.46 h60; Top Overlay "-" at 4366.65,1482.46 h60
PC-104: Top Overlay "H1" at 2550.41,4455.37 h60; Top Overlay "H2" at 2550.41,4612.85 h60; Top Overlay "1" at 2726,4416 h60; Top Overlay "2" at 2726,4516 h60; Top Overlay "1" at 2726,4616 h60; Top Overlay "2" at 2726,4716 h60; Top Overlay "51" at 5412.61,4384.5 h60; Top Overlay "52" at 5412.61,4482.93 h60; Top Overlay "51" at 5408.68,4581.35 h60; Top Overlay "52" at 5408.68,4679.78 h60; Mechanical 1 "J1" at 2926,4616 h30